# Altium PCB CH32V203F-R0-1v0.PcbDoc
Units mil, origin at the board's own origin, x right, y up, seen from the top; angles counter-clockwise.
Board outline 1496.06 x 2165.35 mil, 2 copper layers (Top Layer, Bottom Layer); 29 components, 31 nets, 119 pads, 264 vias.
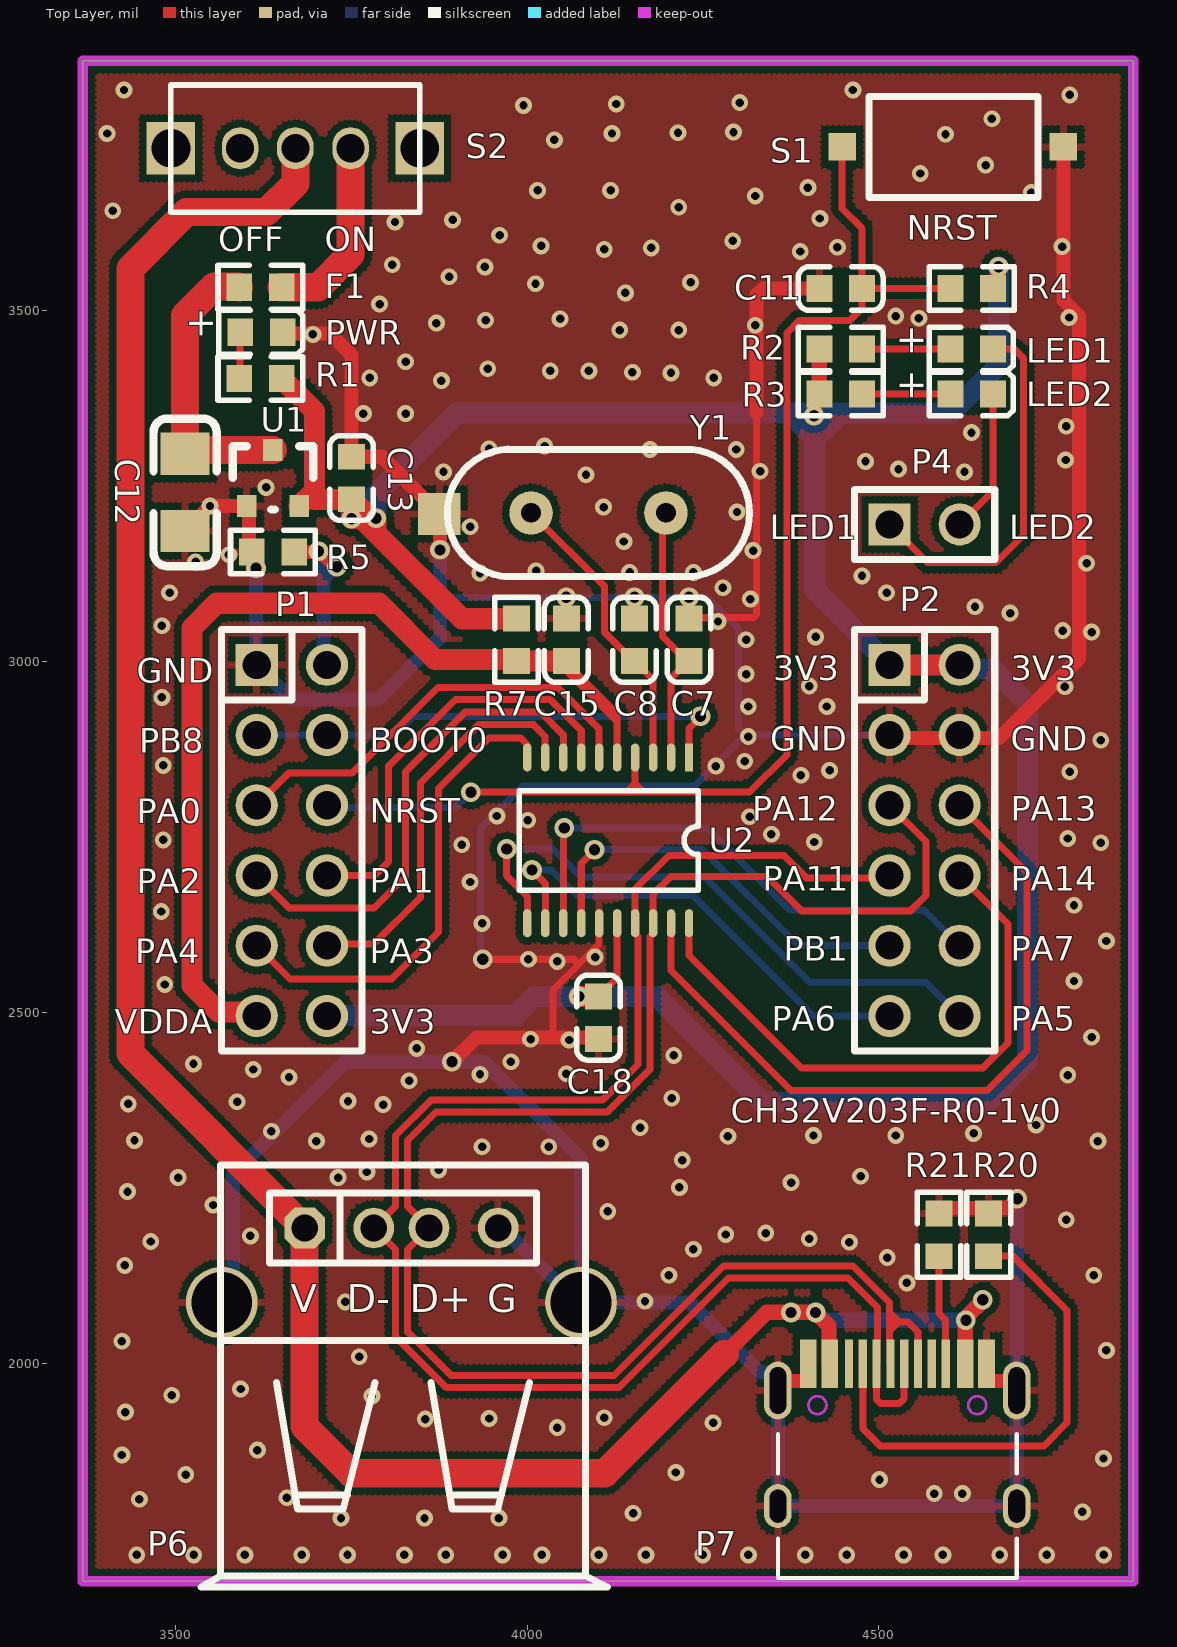
[diagram p0: Top Layer view]
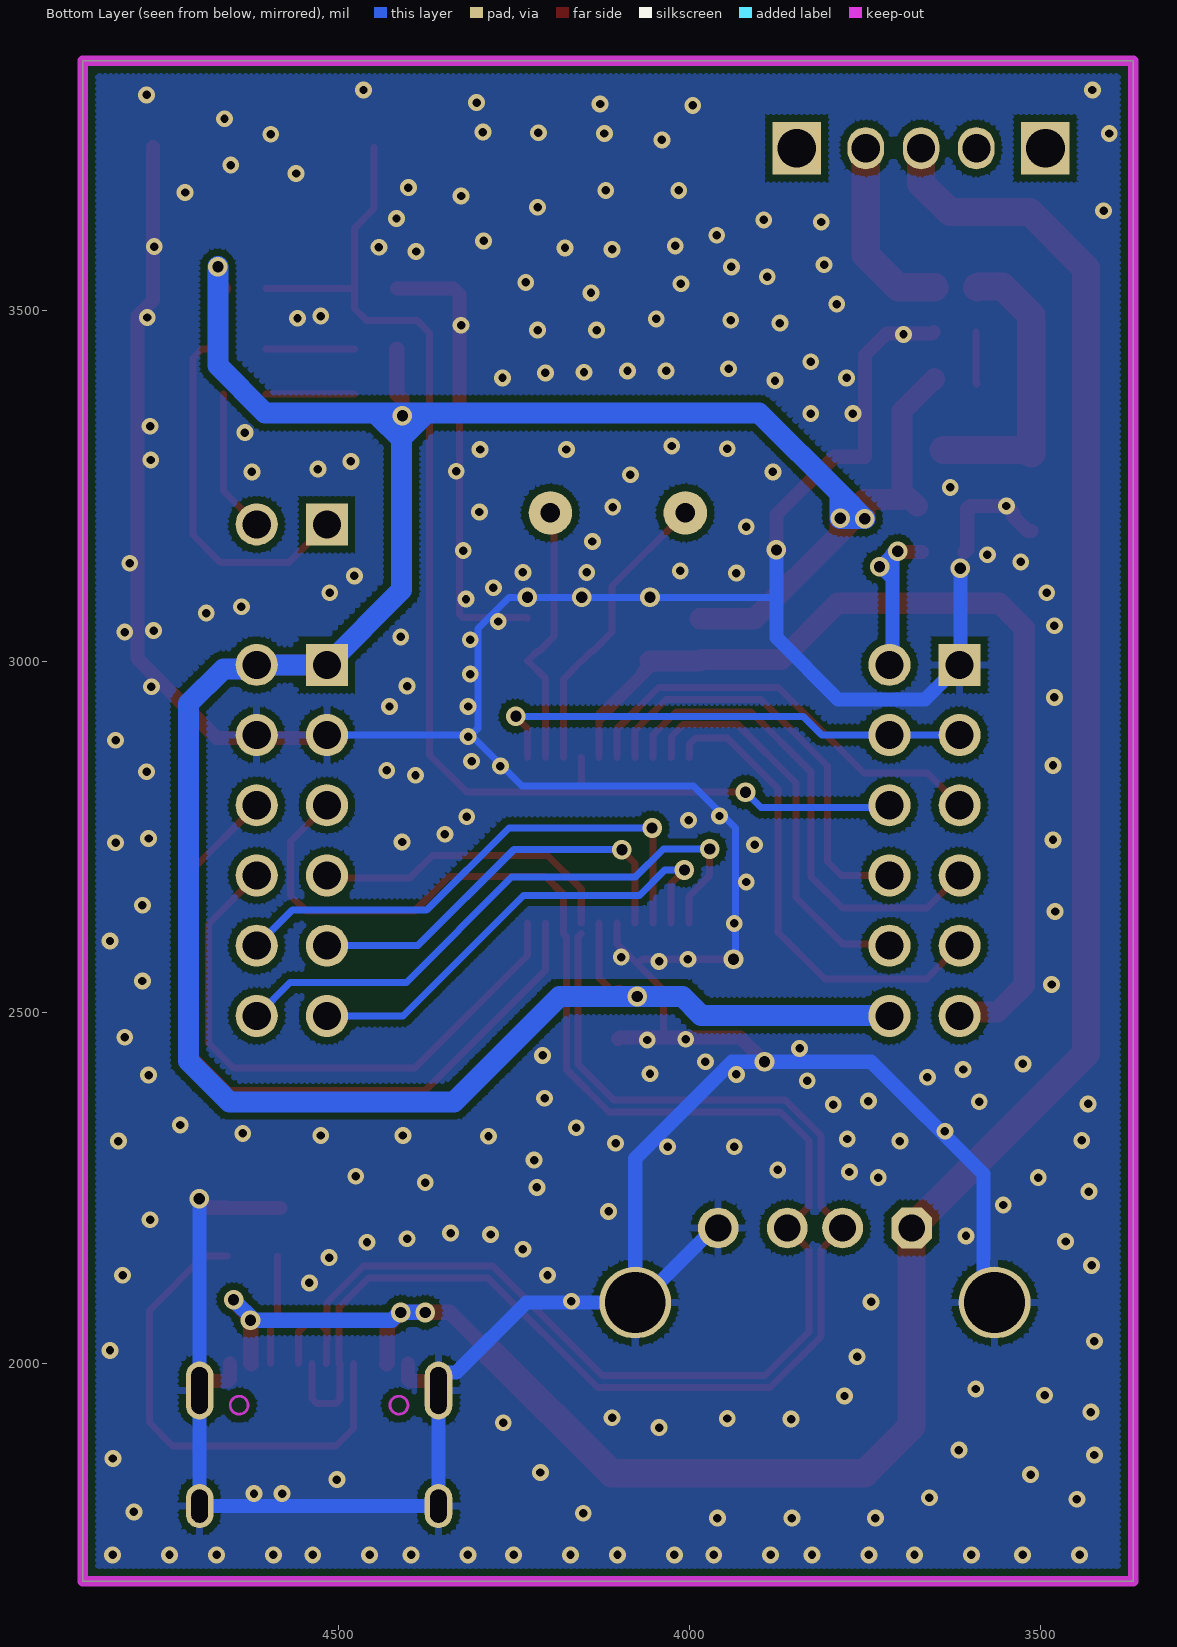
[diagram p1: Bottom Layer view, seen from below]

## Layer stack, top to bottom
Top Solder: solder mask 0.4, Solder Resist, Dk 3.5
Top Layer: signal copper 1.4
Dielectric 1: dielectric 12.6, FR-4, Dk 4.8
Bottom Layer: signal copper 1.4
Bottom Solder: solder mask 0.4, Solder Resist, Dk 3.5

## Board outline
3367.52,1690 4863.58,1690 4863.58,3855.35 3367.52,3855.35

## Design rules (kind name [scope] priority, off if disabled: settings)
Clearance Clearance_1 [InPolygon] p1: gap=10 ignorepadtopadclearanceinfootprint=FALSE
Clearance [All] p2: gap=6 ignorepadtopadclearanceinfootprint=FALSE
ComponentClearance [All] p1 off: gap=10 collisioncheckmode=3 verticalgap=10 showdistances=FALSE
DiffPairsRouting [All] p1: maxlimit=10 minlimit=7 mostfreqgap=8 toplayer_minwidth=6 toplayer_maxwidth=15 toplayer_prefwidth=8 bottomlayer_minwidth=6 bottomlayer_maxwidth=15 bottomlayer_prefwidth=8 maxuncoupledlength=500
MinimumSolderMaskSliver [All] p1 off: minsoldermaskwidth=10
PolygonConnect PolygonConnect_1 [IsVia] p1: connectstyle=Direct reliefconductorwidth=10 reliefentries=4 polygonreliefangle="90 Angle" airgapwidth=10
PolygonConnect [All] p2: connectstyle=Relief reliefconductorwidth=10 reliefentries=4 polygonreliefangle="90 Angle" airgapwidth=10
RoutingVias [All] p1: holewidth=16 width=28 viastyle="Through Hole" minholewidth=12 minwidth=24 maxholewidth=28 maxwidth=50
SilkToSilkClearance [All] p1 off: silktosilkclearance=10
SilkToSolderMaskClearance [IsPad] p1 off: minsilkscreentomaskgap=10 clearancetoexposedcopper=TRUE
SolderMaskExpansion [All] p1: expansion=4 istentingtop=FALSE
Width [All] p1: maxlimit=100 minlimit=6 preferedwidth=10
25 further rules are at their usual default settings.

## Classes and differential pairs
differential pair NewDifferentialPair1: +PA11 -PA12

## Components (designator, comment, footprint, x,y, rotation, side; value= is the part's Value field where it differs from the comment)
C7 "22pF" 0603_C 4230.63,3061.32 r270 top
C8 "22pF" 0603_C 4153.07,3061.32 r270 top
C11 "0.1uF" 0603_C 4416.37,3531.25 r0 top
C12 "10uF" 3216_C 3513,3296 r90 top
C13 "2.2uF" 0603_C 3750,3291.63 r270 top
C15 "0.1uF" 0603_C 4055.94,3000.69 r90 top
C18 "0.1uF" 0603_C 4101.87,2462.44 r90 top
F1 "500mA" 0603 3650.63,3533 r180 top
LED1 "LED1   blue" 0603+ 4603,3445 r0 top
LED2 "LED2  blue" 0603+ 4603,3381 r0 top
P1 "HEADER 6x2" IDC12-2.54mm 3615,2995.32 r0 top
P2 "HEADER 6x2" IDC12-2.54mm 4516.1,2995.32 r0 top
P4 "2HEAD" SIP2-2.54mm 4516.1,3195.32 r270 top
P6 "USB_A" USBAF 3683.29,2193.31 r0 top
P7 "TYPE-C" TYPE-C-Receptacle-2.0 4527.34,2000 r0 top
PWR "POWER  red" 0603+ 3591.38,3469 r0 top
R1 "1K" 0603 3590,3403 r0 top
R2 "1K" 0603 4416.37,3445 r0 top
R3 "1K" 0603 4416.37,3381 r0 top
R4 "NC(10K)" 0603 4603,3531.25 r0 top value=10K
R5 "4.7K" 0603 3668.41,3156 r180 top value=10K
R7 "0Ω" 0603 3985,3061.32 r270 top
R20 "NC(5.1K)" 0603 4657.48,2153.23 r90 top
R21 "NC(5.1K)" 0603 4586.61,2153.23 r90 top
S1 "NRST" SMD_6.1x3.65x2.5mm-KEY 4448.82,3732.91 r0 top
S2 "SW" KEY2 3670,3731 r0 top
U1 "6219P33M" SOT-23 3600.6,3221.47 r0 top
U2 "CH32V203F6" TSSOP20 4230.7,2863.32 r180 top
Y1 "8M" XT_AT49 4005.72,3211.69 r270 top

## Footprints (in the part's own frame and the unit in brackets; to place one, negate y for a bottom-side part, rotate by r counter-clockwise, add the part's x,y. Pads: shape width x height; smd on the part's side, far side on the other; paste and mask are expansions set on the pad)
0603 [mm]
  rect 0.93x0.98 smd: 1(0,0) 2(1.54,0)
  silkscreen extent -0.76,-0.79 2.3,0.79
0603+ [mm]
  rect 0.93x0.98 smd: 1(0,0) 2(1.54,0)
  silkscreen extent -0.76,-0.79 2.27,0.79
0603_C [mm]
  rect 0.93x0.98 smd: 1(0,0) 2(1.54,0)
  silkscreen extent -0.76,-0.79 2.31,0.79
3216_C [mil]
  rect 60x70 smd: 1(0,0) 2(-110,0)
  silkscreen extent -160,-45 50,45
IDC12-2.54mm [mil]
  rect 60x60 hole 40: 1(0,0)
  round 60 hole 40: 2(100,0) 3(0,-100) 4(100,-100) 5(0,-200) 6(100,-200) 7(0,-300) 8(100,-300) 9(0,-400) 10(100,-400) 11(0,-500) 12(100,-500)
  silkscreen extent -50,-550 150,50
KEY2 [mm]
  rect 1.75x1.9 hole 1.4: 0(-4.5,0) 0(4.5,0)
  oval 1.321x1.524 hole 1.016: 1(0,0) 2(-2,0) 3(2,0)
  silkscreen extent -4.51,-2.31 4.5,2.29
SIP2-2.54mm [mil]
  rect 60x60 hole 40: 1(0,0)
  round 60 hole 40: 2(0,100)
  silkscreen extent -50,-50 50,150
SMD_6.1x3.65x2.5mm-KEY [mm]
  rect 1x1 smd: 1(0,0) 2(8,0)
  silkscreen extent 0.98,-1.83 7.08,1.83
SOT-23 [mm]
  rect 0.7x0.8 smd: 1(0,0) 2(1.9,0) 3(0.95,2.02)
  silkscreen extent -0.51,-0.13 2.41,2.16
TSSOP20 [mil]
  rect 12x40 smd: 1(0,0)
  oval 12x40 smd: 2(25.6,0) 3(51.2,0) 4(76.8,0) 5(102.4,0) 6(128,0) 7(153.5,0) 8(179.1,0) 9(204.7,0) 10(230.3,0) 11(230.3,236) 12(204.7,236) 13(179.1,236) 14(153.5,236) 15(128,236) 16(102.4,236) 17(76.8,236) 18(51.2,236) 19(25.6,236) 20(0,236)
  silkscreen extent -13,47 242,189
TYPE-C-Receptacle-2.0 [mm]
  oval 1x1.6 hole 0.6 slot 1.2 at 90 deg: 0(-4.32,-5.15) 0(4.32,-5.15)
  oval 1x2.1 hole 0.6 slot 1.7 at 90 deg: 0(-4.32,-0.97) 0(4.32,-0.97)
  rect 0.6x1.75 smd: A1(-3.225,0) A4(-2.45,0) B1(3.225,0) B4(2.45,0)
  rect 0.3x1.75 smd: A5(-1.25,0) A6(-0.25,0) A7(0.25,0) A8(1.25,0) B5(1.75,0) B6(0.75,0) B7(-0.75,0) B8(-1.75,0)
  Keep-Out Layer circle w0.1: c-2.89,-1.5 r0.325
  Keep-Out Layer circle w0.1: c2.89,-1.5 r0.325
  silkscreen extent -4.32,-7.75 4.32,-2.55
USBAF [mm]
  round 2.6 hole 2.2: 0(-3,-2.7) 0(10,-2.7)
  oct 1.473x1.473 hole 0.965: 1(0,0)
  round 1.473 hole 0.965: 2(2.5,0) 3(4.5,0) 4(7,0)
  silkscreen extent -3.75,-12.99 10.95,2.29
XT_AT49 [mil]
  rect 60x60 smd: 0(1.69,-130.72)
  round 62 hole 28: 1(0,0) 2(0,192.13)
  silkscreen extent -91,-119 91,311

## Part data
C7 C8 C11 C15 C18: library part Cap, "Capacitor", LatestRevisionDate=17-Jul-2002, LatestRevisionNote="Re-released for DXP Platform.", PackageReference=RAD-0.3, Published=8-Jun-2000, Publisher="Altium Limited"
C12 C13: library part CAP, "Capacitor"
F1: library part FUSE1, "Fuse"
LED1 LED2 PWR: library part LED0, "Typical INFRARED GaAs LED", LatestRevisionDate=08-Jul-2005, LatestRevisionNote="Mech Layer 1 removed.", PackageReference=LED-0, Published=8-Jun-2000, Publisher="Altium Limited"
P1 P2: "Header, 6-Pin, Dual row"
P6: library part USB, "USB Port"
P7: library part TYPE-C1
R1 R2 R3: library part "Res Semi", "Semiconductor Resistor", LatestRevisionDate=17-Jul-2002, LatestRevisionNote="Re-released for DXP Platform.", PackageReference=AXIAL-0.5, Published=8-Jun-2000, Publisher="Altium Limited"
R4 R5 R7 R20 R21: library part Res2, "Resistor"
  R4 R5 R7: LatestRevisionDate=17-Jul-2002, LatestRevisionNote="Re-released for DXP Platform.", PackageReference=AXIAL-0.4, Published=8-Jun-2000, Publisher="Altium Limited"
S1: library part KEY
U2: "RISC-V LMD-MCU, 144MHz, USB FS, CAN, Mul-ADC,OPA"
Y1: library part XTAL, "Crystal Oscillator", LatestRevisionDate=17-Jul-2002, LatestRevisionNote="Re-released for DXP Platform.", PackageReference=R38, Published=8-Jun-2000, Publisher="Altium Limited"

## Via types
v1: diameter 24, hole 12, Top Layer to Bottom Layer, tented both sides, 239 vias
v2: diameter 28, hole 16, Top Layer to Bottom Layer, tented both sides, 25 vias

## Nets (pads, with @x,y where several pads share a name; then routed paths per layer and width w, separated by ;. In a path a pad name is that pad's centre, name@x,y a point inside that pad or via, vN(x,y) a via of type N, cw(c..) or ccw(c..) an arc to the next point about the centre after c; other vN are vias at no path point)
+5V: P6.1 P7.A4 P7.B4 S2.1 | length 3414.9
  Top Layer w22: 4282,2014 4341,2073 v2(4376,2073) v2(4411,2073) 4430.07,2053.93 4430.07,2000.81 P7.A4 ; P7.B4 4624.4,2000.6 4624.4,2061.4 v2(4625,2062) 4626.15,2063.15 4626.15,2066.52 4649,2089.38 v2(4649,2091)
  Top Layer w40: S2.1 3670,3681 3629,3640 3515,3640 3435,3560 3435,2441.6 P6.1 3683.29,1910.29 3749.58,1844 4110.75,1844 4280.75,2014 4282,2014
  Bottom Layer w22: v2(4376,2073) v2(4411,2073) 4412.62,2073 4423.62,2062 v2@4620,2062 ; v2(4625,2062) v2@4620,2062 ; v2(4649,2091) v2@4620,2062
BOOT0: P1.3 P1.4 U2.1 | length 708.5
  Top Layer w10: U2.1 4230.7,2904.36 4247,2920.65 v2(4247,2922)
  Bottom Layer w10: P1.3 P1.4 3811.32,2895.32 3838,2922 v2(4247,2922)
GND: C7.1 C8.1 C11.1 C12.2 C13.1 C15.2 C18.1 P1.1 P2.3 P2.4 P6.0 P6.4 P7.0 P7.A1 P7.B1 PWR.2 R5.2 R20.2 R21.2 S1.2 U1.1 U2.15 Y1.0 | length 7703.2
  Top Layer w10: v2(3937,2576) 4067,2576 4074,2569 ; 4037,2464.8 4037,2532 4074,2569 ; U2.15 4102.7,2597.7 4074,2569 ; C7.1 4232.31,3063 4323,3063 4327,3067 4327,3355
  Top Layer w20: C12.2 3518,3186 3538,3206 3538,3211 v1(3548.47,3221.47) U1.1 3604.19,3217.88 3604.19,3159.59 R5.2 ; P1.1@3600.6,3009.72 P1.1 ; PWR.2 3654.01,3467 3719.28,3467 3750,3436.28 C13.1 3793.37,3291.63 Y1.0 3876,3209 v2(3876,3159) ; v2(3893,2430) 3927.8,2464.8 4037,2464.8 4099.5,2464.8 C18.1 ; 4327,3355 4327,3522.47 4335.79,3531.25 C11.1 ; P7.0@4357.26,1961.81 4357.26,1966.6 4366.21,1975.55 4398.56,1975.55 4400.37,1977.36 P7.A1 ; P2.3@4509,2891 4673,2891 4786,3004 4786,3325 4786,3492 4763.78,3514.22 S1.2 ; R21.2@4582.46,2221.63 4657.48,2221.63 4657.96,2222.11 4685.11,2222.11 v2(4698,2235) ; P7.B1 4654.31,1977.36 4656.12,1975.55 4688.47,1975.55 4697.42,1966.6 P7.0@4697.42,1961.81
  Bottom Layer w10: v2(3876,3159) 3876,3091.44 v2(4055.94,3091.44) v2(4153.07,3091.44) v2(4230.63,3091.44) 4256.56,3091.44 4301,3047 4301,2905 v1@4310.68,2895.32 ; v2(3937,2576) 3934,2579 3934,2763.14 3993.86,2823 4238.35,2823 v1@4310.68,2895.32 ; P2.3 4509.34,2895.32 v1@4310.68,2895.32
  Bottom Layer w20: P6.0@3550,2091 3580.94,2121.94 3580.94,2269.94 3741,2430 v2(3893,2430) 3939,2430 4076.99,2292.01 P6.0@4076.99,2097 ; v2(3614,3133) 3614,2996.32 P1.1 3664.32,2946 3788,2946 3876,3034 3876,3091.44 v2(3876,3159) ; P6.4 3964.79,2193.31 4061.09,2097 P6.0@4064,2097 ; P6.0@4076.99,2087.01 4232.06,2087.01 4331.9,1987.17 4348.31,1987.17 4357.26,1978.22 4357.26,1961.81 4357.26,1797.24 4697.42,1797.24 4697.42,1961.81 4697.71,1962.1 4697.71,2234.71 v2(4698,2235)
  other v1: 3444.25,1727.79 3525.25,1727.79 3598.25,1727.79 3679.25,1727.79 3744.25,1727.79 3825.25,1727.79 3884.25,1727.79 3965.25,1727.79 4021.25,1727.79 4102.25,1727.79 4169.25,1727.79 4250.25,1727.79 4315.25,1727.79 4396.25,1727.79 4455.25,1727.79 4536.25,1727.79 4592.25,1727.79 4673.25,1727.79 4740.25,1727.79 4821.25,1727.79 3735,1780 3854,1780 3960,1780 4151,1787 4791,1789 3448,1807 3658,1809 4580,1815 4620,1815 4502,1835 3514,1842 4212,1845 4821,1865 3423,1870 3616,1877 4043,1909 4265,1916 3855,1921 3946,1922 4110,1923 3428,1931 3779,1954 3494,1955 3592,1964 3761,2010 4825,2019 3423,2032 3741,2088 4168,2089 4541,2115 4202,2126 4807,2126 3427,2140 4513,2151 4237,2163 4459,2173 3464,2174 4402,2178 3606,2182 4283,2184 4340,2186 4768,2205 4115,2217 3553,2226 3431,2245 4217,2251 4376,2258 3503,2265 3731,2265 4475,2267 3772,2273 3874,2276 4221,2290 3936,2309 4031,2309 4105,2314 3700,2317 4813,2317 3441,2318 3775,2320 4286,2324 4408,2325 4525,2325 4636,2328 3636,2331 4161,2336 4725,2340 3795,2369 3432,2370 3587,2373 3745,2374 4206,2378 3832,2403 3661,2408 4770,2411 3933,2412 4056,2413 3610,2419 3525,2427 3977,2430 4209,2439 3843,2449 4060,2461 4005,2462 4804,2465 3484,2540 4779,2545 4043,2573 4002,2576 4097,2579 4825,2602 3936,2627 3479,2644 4779,2653 3919,2686 3907,2739 4817,2742 4409,2743 3482,2746 4770,2748 4348,2754 4001,2774 4317,2779 3957,2780 4390,2838 4773,2843 4431,2845 4269,2851 3482,2852 4310,2858 4817,2888 4315,2893 4315,2936 4427,2936 3480,2949 4766,2964 4402,2965 4312,2982 4312,3031 4411,3035 4804,3042 4763,3044 3480,3051 4272,3057 4688,3069 4638,3078 4318,3089 3491,3098 4512,3098 4279,3105 4477,3122 3933,3126 4146,3127 4237,3127 4013,3129 4797,3140 3528,3142 3575.48,3152 4322,3158 4138,3171 3919,3192 4299,3213 4109,3220 3628.38,3248 4084,3266 3881,3270 4623,3270 4332,3271 4529,3274 4482,3285 4767,3287 4175,3302 4298,3302 3946,3303 4025,3307 4633,3326 4768,3335 3767,3353 3827,3353 3878,3400 3776,3404 4266,3404 4205,3411 4150,3412 4033,3414 4088,3414 3944,3417 3827,3427 3695,3466 4132,3472 4216,3472 4325,3479 3871,3482 3941,3486 4047,3488 4558,3489 4772,3490 4525,3492 3790,3509 4140,3525 4012,3538 4233,3540 3889,3548 3940,3562 3808,3565 4389,3584 4110,3587 4177,3589 4442,3590 4762,3591 4020,3592 4293,3599 3961,3607 3812,3626 3894,3629 4417,3631 3410,3642 4216,3647 4325,3663 4718,3668 4015,3671 4119,3671 4400,3675 4560,3695 4653,3707 4039,3743 4596,3751 3402,3752 4121,3752 4215,3753 4294,3754 4662,3773 3995,3792 4127,3794 4303,3796 4773,3807 3426,3814 4464,3814
LED1: LED1.2 P4.1 | length 530.3
  Top Layer w10: P4.1 4570.43,3141 4668,3141 4707,3180 4707,3432 4694,3445 LED1.2
LED2: LED2.2 P4.2 | length 205.4
  Top Layer w10: P4.2 4663.63,3242.85 LED2.2
NetC12_1: C12.1 F1.2 U1.3 | length 418.5
  Top Layer w40: F1.2 3589,3534 3554,3534 3513,3493 C12.1 3518,3301 U1.3
NetF1_1: F1.1 S2.3 | length 268.7
  Top Layer w40: F1.1 3702,3533 3748.74,3579.74 S2.3
NetLED1_1: LED1.1 R2.2 | length 126
  Top Layer w10: R2.2 LED1.1
NetLED2_1: LED2.1 R3.2 | length 126
  Top Layer w10: R3.2 LED2.1
NetP1_2: P1.2 R5.1 | length 330.3
  Top Layer w10: R5.1 3669.41,3157 v2(3703,3157) v2@3707,3157
  Top Layer w20: R5.1 3706.72,3156 3727.72,3135 v2(3729,3135)
  Bottom Layer w10: v2@3707,3157 v2@3710.44,3153.56 ; P1.2@3710.44,2999.88 P1.2
  Bottom Layer w20: v2(3703,3157) 3705,3157 v2@3710.44,3151.56 ; P1.2@3710.44,2999.88 3710.44,3122 ; v2@3710.44,3153.56 v2@3710.44,3151.56 ; v2(3729,3135) v2@3727,3135 ; 3710.44,3122 v2@3710.44,3151.56 ; 3710.44,3122 3713.84,3122 3726.84,3135 v2@3727,3135 ; v2@3710.44,3151.56 v2@3727,3135
NetP7_A5: P7.A5 R20.1 | length 710.5
  Top Layer w10: P7.A5 4478.13,1907.87 4503,1883 4736,1883 4769,1916 4769,2076 4691.77,2153.23 R20.1
NetP7_B5: P7.B5 R21.1 | length 157.2
  Top Layer w10: R21.1 4586.61,2071.39 4596.24,2061.76 P7.B5
NetPWR_1: PWR.1 R1.1 | length 74.6
  Top Layer w10: R1.1@3590,3395 3591.38,3396.38 PWR.1
NRST: C11.2 P1.6 R4.1 S1.1 U2.4 | length 1858.7
  Top Layer w10: v2(3920,2814) 4141.8,2814 ; U2.4 4153.8,2863.22 4153.8,2826 ; 4174,2814 4165.8,2814 ; S1.1 4448.82,3645.18 4477,3617 C11.2 ; R4.1 C11.2 ; 4141.8,2814 4153.8,2814 ; 4141.8,2814 4153.8,2826 ; 4153.8,2814 4165.8,2814 ; 4153.8,2814 4153.8,2826 ; 4153.8,2826 4165.8,2814 ; 4165.8,2814 4317,2814 4370,2867 4370,3468 4388,3486 4460,3486 4477,3503 C11.2
  Bottom Layer w10: P1.6@3724,2792 3898,2792 v2(3920,2814)
PA0: P1.5 U2.6 | length 622.4
  Top Layer w10: P1.5 3660.68,2841 3751,2841 3873,2963 4044,2963 4102.7,2904.3 U2.6
PA1: P1.8 U2.7 | length 602.5
  Top Layer w10: P1.8 3783.32,2695.32 3803,2715 3803,2851 3898,2946 4033,2946 4077.2,2901.8 U2.7
PA2: P1.7 U2.8 | length 704.2
  Top Layer w10: P1.7 3661.32,2649 3782,2649 3827,2694 3827,2843 3912,2928 4019,2928 4051.6,2895.4 U2.8
PA3: P1.10 U2.9 | length 573.5
  Top Layer w10: P1.10 3717.68,2598 3782,2598 3848,2664 3848,2827 3931,2910 4009,2910 4025.62,2893.38 4025.62,2863.71 U2.9
PA4: P1.9 U2.10 | length 688.7
  Top Layer w10: P1.9 3662.32,2548 3807,2548 3874,2615 3874,2819 3946,2891 3991,2891 4000.02,2881.98 4000.02,2863.71 U2.10
PA5: P2.12 U2.11 | length 861.4
  Top Layer w10: v2(3971,2733) 3971,2695 4000.4,2665.6 U2.11
  Bottom Layer w10: v2(3971,2733) 4037,2733 4077,2693 4253,2693 4403,2543 4568.43,2543 P2.12
PA6: P2.11 U2.12 | length 678.7
  Top Layer w10: v2(4007,2703) 4026,2684 U2.12
  Bottom Layer w10: v2(4007,2703) 4035,2703 4071,2667 4236,2667 4407.68,2495.32 P2.11
PA7: P2.10 U2.13 | length 768.8
  Top Layer w10: U2.13 4051.6,2761.6 v2(4053,2763)
  Bottom Layer w10: v2(4053,2763) 4257,2763 4374,2646 4565.43,2646 P2.10
PA11: P2.7 P6.2 P7.A7 P7.B7 U2.17 | length 2357.8
  Top Layer w10: U2.17@4153.9,2612.78 4158.2,2608.48 4158.2,2426.34 4107.13,2375.27 3863.04,2375.27 3812.59,2324.82 3812.59,2224.18 P6.2 3812.59,2162.44 3812.59,2038.41 3885,1966 4131,1966 4287,2122 4457,2122 4499.15,2079.85 4499.15,2031.7 4498.72,2031.26 4498.72,2000.91 P7.B7 4497.81,1949.19 4504,1943 4530,1943 4537.18,1950.18 P7.A7 ; U2.17 4153.9,2675.9 4202,2724 4366,2724 4398,2692 4512.78,2692 P2.7
PA12: P2.5 P6.3 P7.A6 P7.B6 U2.18 | length 2530.7
  Top Layer w10: P2.5 4568,2743.43 4568,2667 4546,2645 4391,2645 4342,2694 4205,2694 4179.5,2668.5 U2.18 4179.5,2612.78 4175.2,2608.48 4175.2,2419.3 4114.17,2358.27 3870.08,2358.27 3829.59,2317.78 3829.59,2224.18 P6.3 3829.59,2162.44 3829.59,2045.46 3892.04,1983 4123.96,1983 4279.96,2139 4464.04,2139 4516.15,2086.89 4516.15,2073.09 ; P7.A6 4516.59,2000.91 4516.59,2031.26 4516.15,2031.7 4516.15,2046.54 ; P7.B6 4556.87,2045.13 4542.71,2059.29 4529.43,2059.29 ; 4516.15,2046.54 4528.91,2059.29 ; 4516.15,2046.54 4516.15,2059.29 ; 4516.15,2059.29 4528.91,2059.29 ; 4516.15,2059.29 4516.15,2073.09 ; 4516.15,2073.09 4529.43,2059.81 ; 4528.91,2059.29 4529.43,2059.29 ; 4528.91,2059.29 4529.43,2059.81 ; 4529.43,2059.29 4529.43,2059.81
PA13: P2.6 U2.19 | length 1057.8
  Top Layer w10: U2.19 4205.1,2559.9 4376,2389 4655,2389 4712,2446 4712,2699.43 P2.6
PA14: P2.8 U2.20 | length 848.5
  Top Layer w10: U2.20 4230.7,2581.3 4391,2421 4649,2421 4685,2457 4685,2626.43 P2.8
PB1: P2.9 U2.14 | length 589.2
  Top Layer w10: U2.14 4077.2,2712.33 4096,2731.13 v2(4096,2732)
  Bottom Layer w10: v2(4096,2732) 4250,2732 4386.68,2595.32 P2.9
PD0: C7.2 U2.2 Y1.2 | length 377.8
  Top Layer w10: Y1.2 4193,3206.84 4193,3035.49 4214.49,3014 4217.32,3014 C7.2 ; U2.2 4205.1,2976.15 C7.2@4229.65,3000.69
PD1: C8.2 U2.3 Y1.1 | length 422
  Top Layer w10: Y1.1 4110,3107.42 4110,3042 4138,3014 4139.76,3014 C8.2 4154.06,3000.69 4167.36,2987.39 4167.36,2986.4 4179.5,2974.26 U2.3
VCC: C13.2 C18.2 P1.12 P2.1 P2.2 R1.2 R2.1 R3.1 R4.2 R7.1 U1.2 U2.16 | length 4756.3
  Top Layer w10: C18.2 4102.85,2523.07 4116.16,2536.38 4116.16,2537.36 4128.3,2549.51 U2.16
  Top Layer w22: v2(4408.59,3349.9) 4409.74,3351.05 4409.74,3374.37 R3.1 R2.1 ; R4.2 4670.26,3537.88 4670.26,3561.21 v2(4671.41,3562.35)
  Top Layer w30: R1.2 3650.63,3402.02 3653.94,3398.71 3654.92,3398.71 3697,3356.63 3697,3243.07 U1.2 ; 3697,3231 C13.2 ; R7.1 3984.59,3060.91 3907.09,3060.91 3785,3183 ; v2(4074,2523) 4098.94,2523 4099.94,2524 C18.2@4100.87,2523.07 ; P2.1 P2.2 ; C13.2 3750.98,3231 v2@3777.98,3204 ; C13.2 v2(3750,3203.5) 3750.78,3203.5 3751.28,3204 3768.14,3204 ; 3768.14,3204 3768.14,3199.86 3785,3183 ; 3768.14,3204 v2@3777.98,3204 ; v2@3777.98,3204 v2@3785,3196.98 ; v2@3777.98,3204 v2(3785,3204) v2@3785,3196.98 ; 3785,3183 v2@3785,3196.98
  Bottom Layer w22: 4443,3349.9 4599.9,3349.9 4604,3354
  Bottom Layer w30: P1.12 3715.68,2496 3983,2496 4010,2523 v2(4074,2523) 4185,2523 4335,2373 4655,2373 4713,2431 4713,2940 4663.42,2989.58 4621.84,2989.58 P2.2 P2.1 4409.74,3101.68 4409.74,3316.64 ; v2(3750,3203.5) v2@3750.5,3204 ; v2(4408.59,3349.9) 4409.74,3348.75 4409.74,3318.26 ; 4443,3349.9 4409.74,3316.64 ; v2(4671.41,3562.35) 4671.41,3421.41 4604,3354 4443,3354 4409.74,3354 4374,3354 ; v2@3750.5,3204 3785,3238.5 ; v2@3750.5,3204 v2(3785,3204) 3785,3238.5 ; 3785,3238.5 3900.5,3354 4374,3354 ; 4374,3354 4409.74,3318.26 ; 4409.74,3316.64 4409.74,3318.26
VDDA: C15.1 P1.11 R7.2 U2.5 | length 1458.9
  Top Layer w10: C15.1@4053.32,2989.32 4128.3,2914.34 ; C15.1@4066.81,2990.81 4070.24,2987.39 C15.1@4070.24,2986.4 ; C15.1@4068.92,2985.08 4128.3,2925.7 4128.3,2914.34 ; U2.5 4128.3,2914.34
  Top Layer w30: P1.11 3609.26,2501.06 3560.94,2501.06 3523,2539 3523,3048 3558,3083 3789,3083 3869,3003 3982.69,3003 R7.2 C15.1
pads on no net: P7.A8 P7.B8 S2.0 S2.2

## Polygon pours and split planes (outlines as drawn)
GND on Bottom Layer "GND" (hatched 90Degree grid 8 track 8, remove dead copper, pour order 1): 3367.52,3855.35 3367.52,1690 4863.58,1690 4863.58,3855.35
GND on Top Layer "GND" (hatched 90Degree grid 8 track 8, remove dead copper, pour order 0): 3367.52,3855.35 3367.52,1690 4863.58,1690 4863.58,3855.35

## Keep-outs
Keep-Out Layer:
  the board outline again, w15

## Silkscreen, mask and mechanical layers (free items; w line width, h text height)
Top Overlay:
  text "OFF" at 3560,3584 h35
  text "ON" at 3712,3584 h35
  text "LED1" at 4346,3174 h35
  text "LED2" at 4687,3174 h35
  text "3V3" at 4350.33,2973 h35
  text "3V3" at 4689,2973 h35
  text "GND" at 3444,2970 h35
  text "GND" at 4346.66,2873.2 h35
  text "GND" at 4689,2873.2 h35
  text "BOOT0" at 3776,2871 h35
  text "PB8" at 3447.67,2870 h35
  text "PA12" at 4321,2773.4 h35
  text "PA13" at 4689,2773.4 h35
  text "NRST" at 3776,2770.75 h35
  text "PA0" at 3444,2770 h35
  text "PA11" at 4336,2673.6 h35
  text "PA14" at 4689,2673.6 h35
  text "PA2" at 3444,2670 h35
  text "PA1" at 3776,2670.5 h35
  text "PB1" at 4365.32,2573.8 h35
  text "PA7" at 4689,2573.8 h35
  text "PA4" at 3442.33,2570 h35
  text "PA3" at 3776,2570.25 h35
  text "PA6" at 4348.33,2474 h35
  text "PA5" at 4689,2474 h35
  text "VDDA" at 3413.17,2470 h35
  text "3V3" at 3776,2470 h35
  text "CH32V203F-R0-1v0" at 4290,2343 h35
Mechanical 1:
  the board outline again, w10

## Text inside footprints (layer, text, board x,y; h text height)
LED1: Top Overlay "+" at 4564.92,3434.01 h40 r90
LED2: Top Overlay "+" at 4564.92,3370.01 h40 r90
P6: Top Overlay "G" at 3943.29,2073.31 h40; Top Overlay "V" at 3663.29,2073.31 h40; Top Overlay "D+" at 3833.29,2073.31 h40; Top Overlay "D-" at 3743.29,2073.31 h40
PWR: Top Overlay "+" at 3553.3,3458.01 h40 r90